# EAGLE board Temperatura y humedadC (EAGLE 7.5.0)
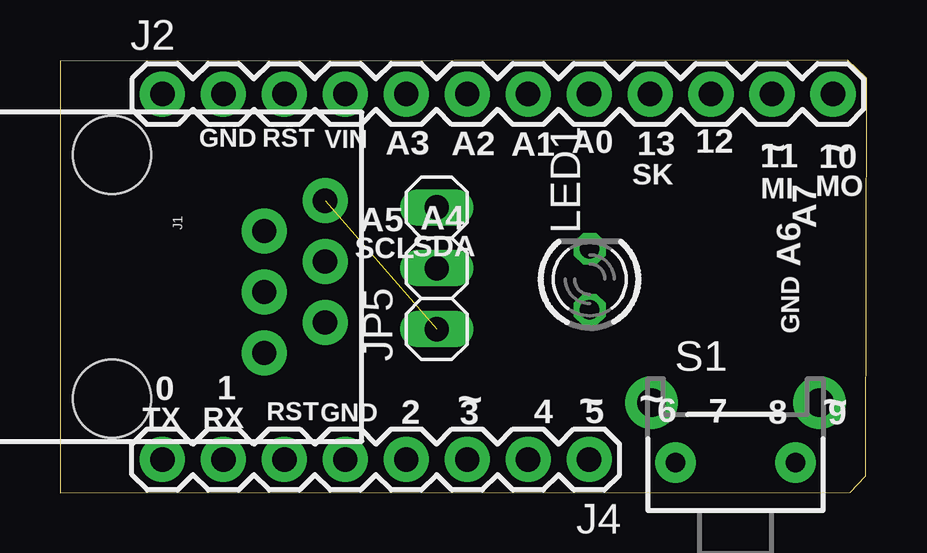
[diagram p0: board, top side]
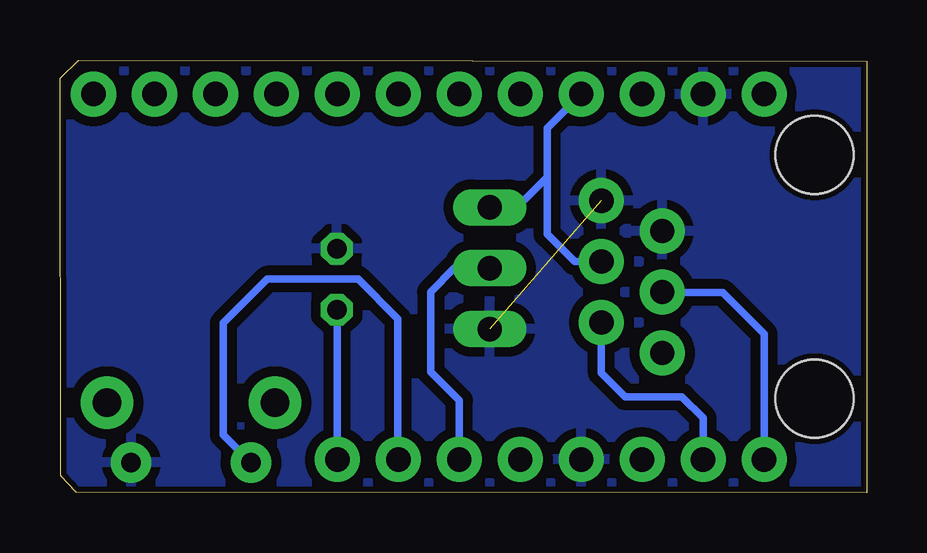
[diagram p1: board, bottom side, seen from below]

Size 33.6 x 18.06 mm. Coordinates in mm from the lower left corner, seen from the top.
Outline: 0,0 32.92,0.02 33.58,0.71 33.6,17.3 32.82,18.06 0,18.01 0,0
Copper layers (1*16): Top 0.035mm / dielectric 1.5mm / Bottom 0.035mm
Design rules "ITEADstudio_DRC *": minimum track width 6mil, minimum drill 12mil, track to track 16mil, track to pad 12mil, pad to pad 6mil, via to via 6mil, smd to smd 0mil, copper to edge 10mil, drill to drill 10mil, minimum pad ring 10mil, minimum via ring 6mil, stop-mask expansion 2mil, vias tented up to drill 100mil, thermal gap 15mil
Net classes: 1 power: width 0.381 mm, clearance 0.254 mm

## Footprints (pad centres in the part's own frame; a part is rotated, then mirrored left to right if it is on the bottom)
RJ11-6 = drill 1.016 pad 1.88: 1 -3.175,8.89; 2 -1.905,6.35; 3 -0.635,8.89; 4 0.635,6.35; 5 1.905,8.89; 6 3.175,6.35 | hole 3.251: -5.08,0; 5.08,0
1X12 = drill 1.016 pad 1.88: 1 0,0; 2 2.54,0; 3 5.08,0; 4 7.62,0; 5 10.16,0; 6 12.7,0; 7 15.24,0; 8 17.78,0; 9 20.32,0; 10 22.86,0; 11 25.4,0; 12 27.94,0
1X08_ROUND = drill 1.016 pad 1.88: 1 0,0; 2 2.54,0; 3 5.08,0; 4 7.62,0; 5 10.16,0; 6 12.7,0; 7 15.24,0; 8 17.78,0
1X03 = drill 1.016 long: 1 -2.54,0; 2 0,0; 3 2.54,0
LED3MM = drill 0.813 octagon: A -1.27,0; K 1.27,0
TACTILE-PTH-SIDEEZ = drill 0.8 pad 1.7: 1 -2.5,0; 2 2.5,0 | drill 1.2 pad 2.2: ANCHOR1 -3.5,2.5; ANCHOR2 3.5,2.5

## Placement (x,y rotation side)
J1  RJ11  [RJ11-6]  2.16,9.02 270 top
J2  [1X12]  4.27,16.64 0 top
J4  [1X08_ROUND]  22.05,1.4 180 top
JP5  [1X03]  15.7,9.37 90 top
LED1  [LED3MM]  22.07,8.92 90 top
S1  SWITCH-MOMENTARY-2SIDE_EZ  [TACTILE-PTH-SIDEEZ]  28.14,1.27 0 top

## Library data of the parts
J1 = SparkFun-Connectors; PROD_ID: CONN-08590
J2 = SparkFun-Connectors
J4 = SparkFun-Connectors; PROD_ID: CONN-08437
JP5 = pinhead
LED1 = led
S1 = SparkFun-Electromechanical

## Nets
GND [power]: J1.1 J1.2 J2.2 J4.5 JP5.1 LED1.K S1.2
N$1: J4.2 S1.1
N$3: J4.1 LED1.A
N$4: J1.4 J4.8
N$6: J1.5 J4.7
N$7: J2.1
N$9: J2.5
N$10: J4.3 JP5.2
N$11: J2.6
N$12: J2.7
N$13: J2.8
N$14: J2.9
N$15: J2.10
N$16: J2.11
N$17: J2.12
VIN: J1.3 J2.4 JP5.3

## Tracks (layer width: path | path; a pad name or v marks a point on that pad's centre or on a via)
AGND
  pour Bottom: 3,17.91 33.38,17.75 33.45,0.15 0.23,0.05 0.18,17.86
GND  (1 unrouted)
  pour Bottom: 0.13,17.81 33.43,17.88 33.53,0.15 0.23,0.08
N$1
  Bottom 0.305: J4.2 19.53,1.42 19.53,7.26 21.18,8.91 24.97,8.91 26.8,7.09 26.8,2.42 S1.1
N$3
  Bottom 0.305: J4.1 22.05,7.62 LED1.A
N$4
  Bottom 0.305: J4.8 4.27,6.63 5.99,8.36 8.48,8.36 J1.4
N$6
  Bottom 0.305: J4.7 6.81,3.12 7.7,4.01 10.06,4.01 11.05,5 J1.5
N$10
  Bottom 0.305: J4.3 16.97,3.86 18.16,5.05 18.16,8.38 17.17,9.37 JP5.2
VIN
  Bottom 0.305: J1.3 12.17,9.65 13.31,10.8 13.31,13.18 | 13.31,13.18 13.31,15.21 J2.4 | JP5.3 14.58,11.91 13.31,13.18

## Text on the board
_tsilk: VIN | A3 | A2 | A1 | 13 | 12 | ~ | GND | RST | A0 | 11 | 10 | ~ | A4 | SK | MI | A7 | MO | A5 | A6 | SCL | SDA | GND | 0 | 1 | 6 | TX | RX | RST | GND | 2 | ~ | 3 | 4 | ~ | 5 | ~ | 7 | 8 | ~ | 9